# Altium PCB PCB_Rev3_FINAL4LAYER.PcbDoc
Units mm, origin at the board's own origin, x right, y up, seen from the top; angles counter-clockwise.
Board outline 120.4 x 83.82 mm, 4 copper layers (Top Layer, GND, Power, Bottom Layer), stack 0.602 mm thick; 59 components, 76 nets, 363 pads, 34 vias.
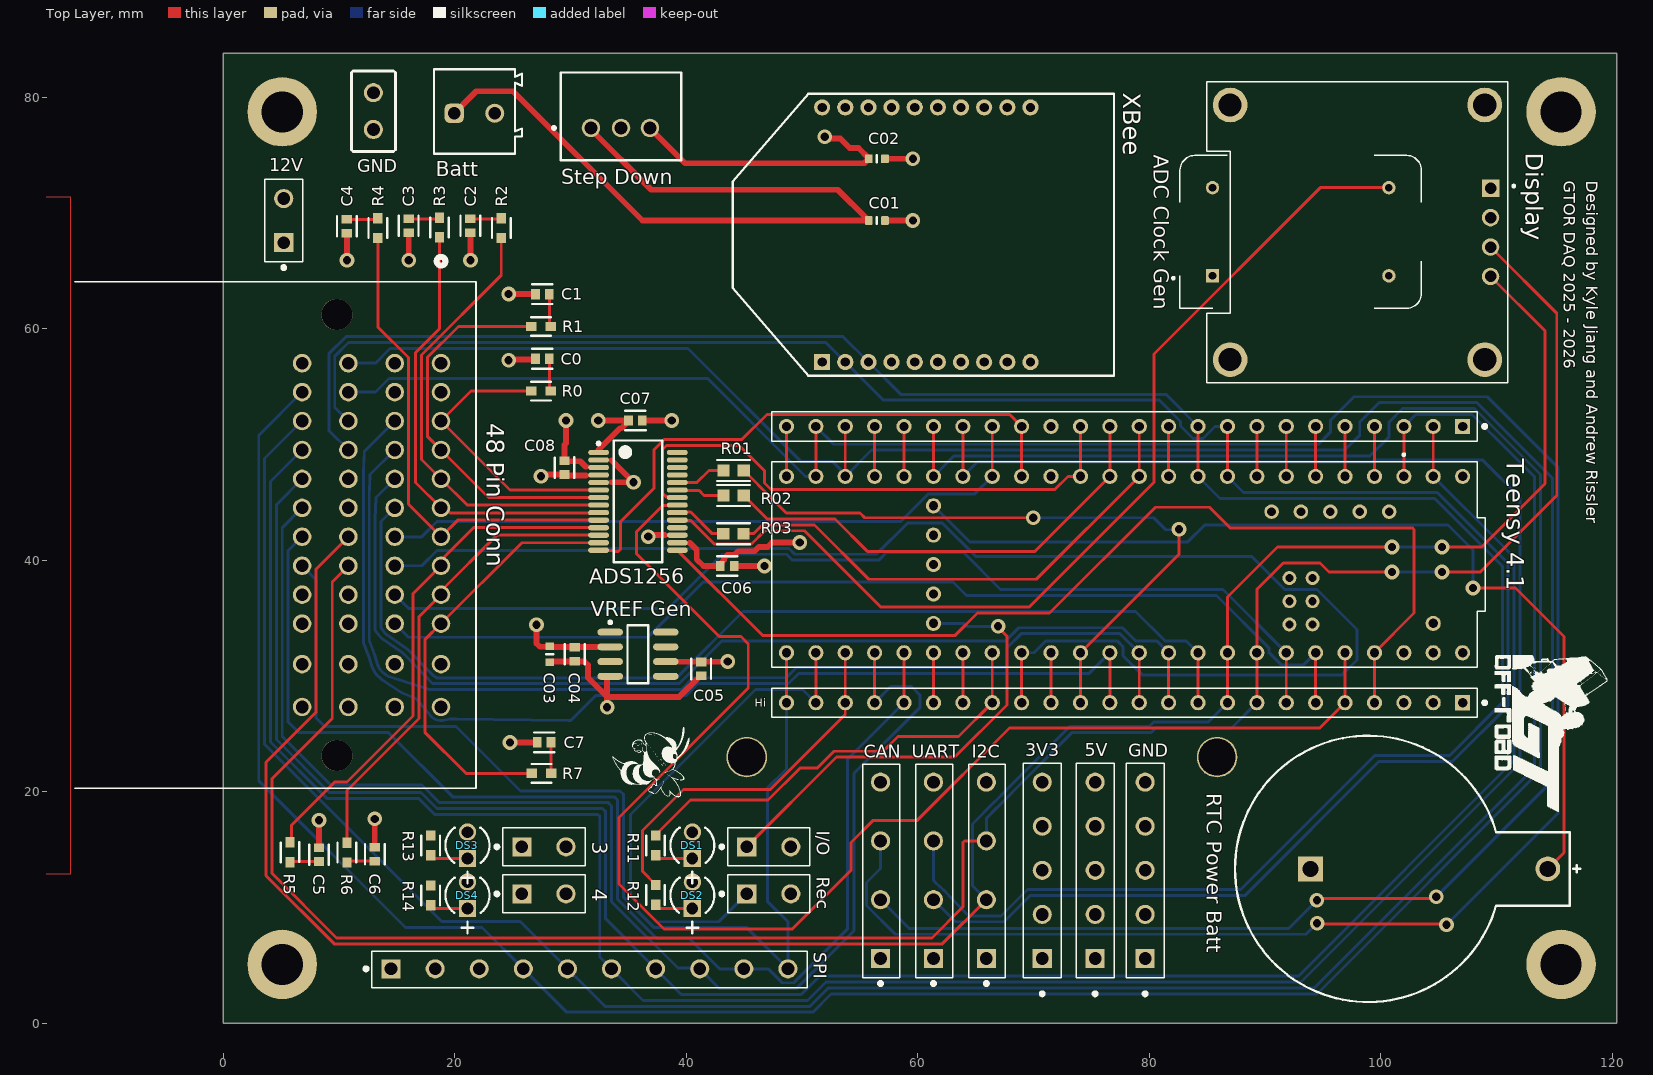
[diagram p0: Top Layer view]
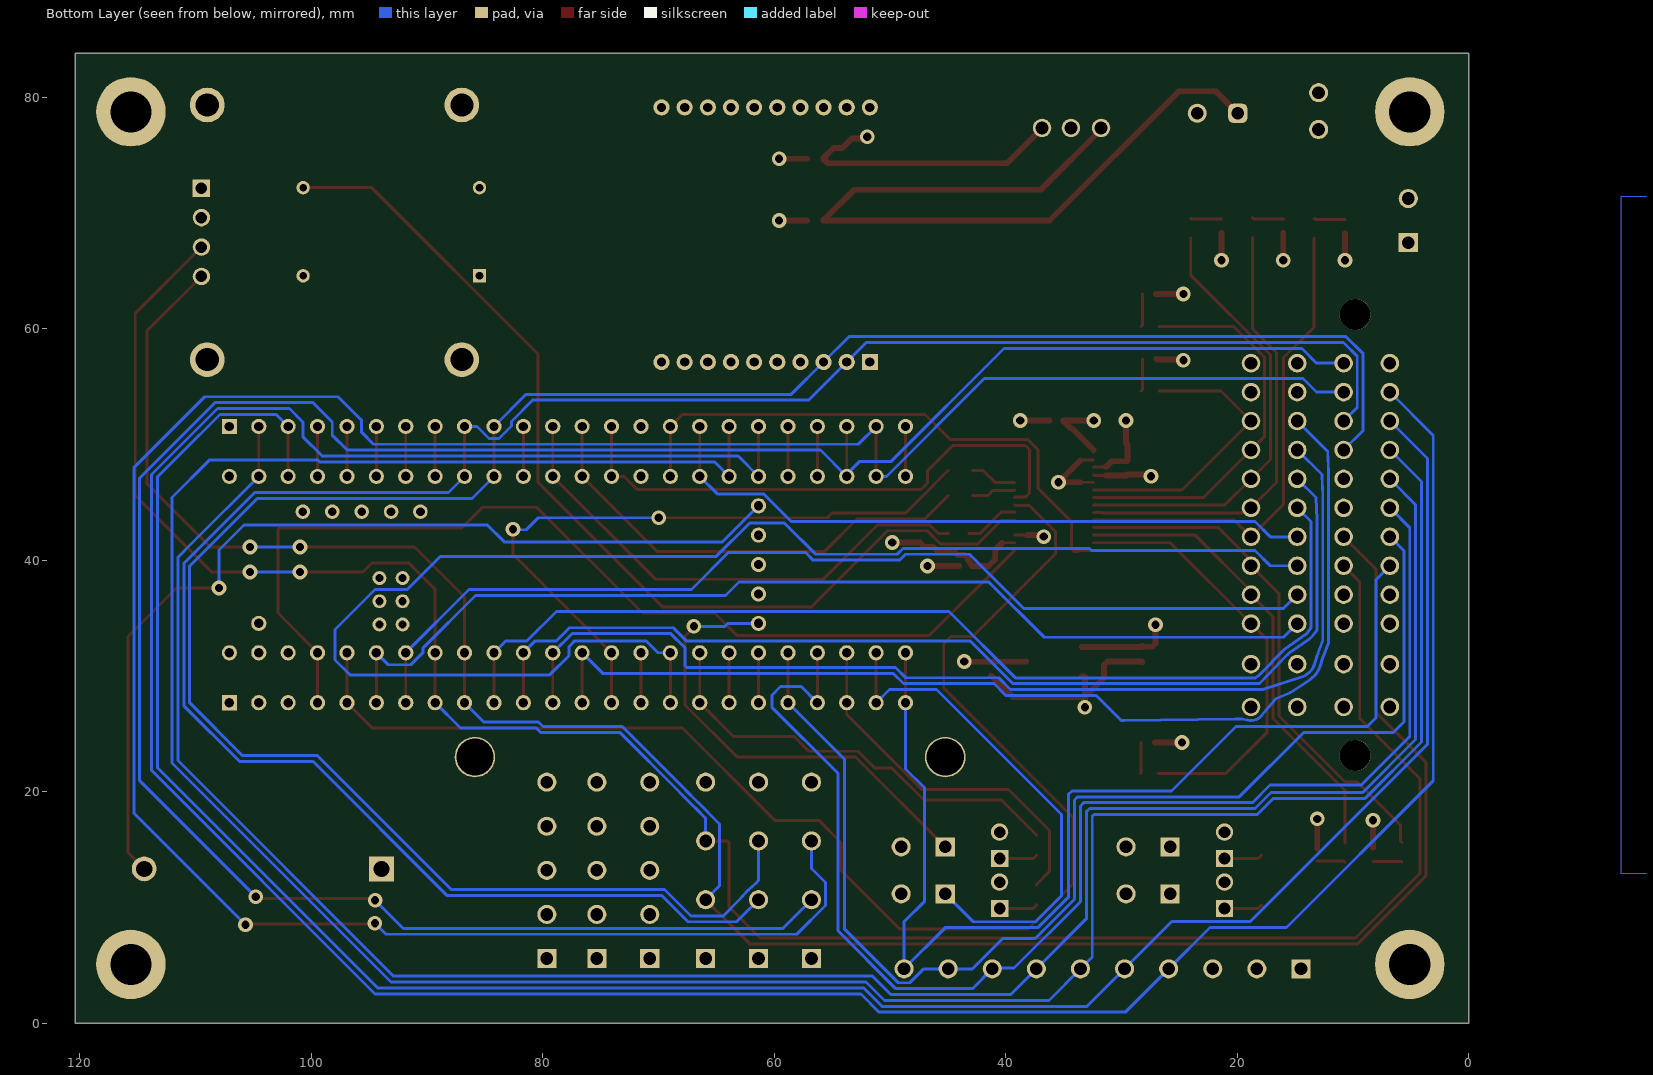
[diagram p1: Bottom Layer view, seen from below]
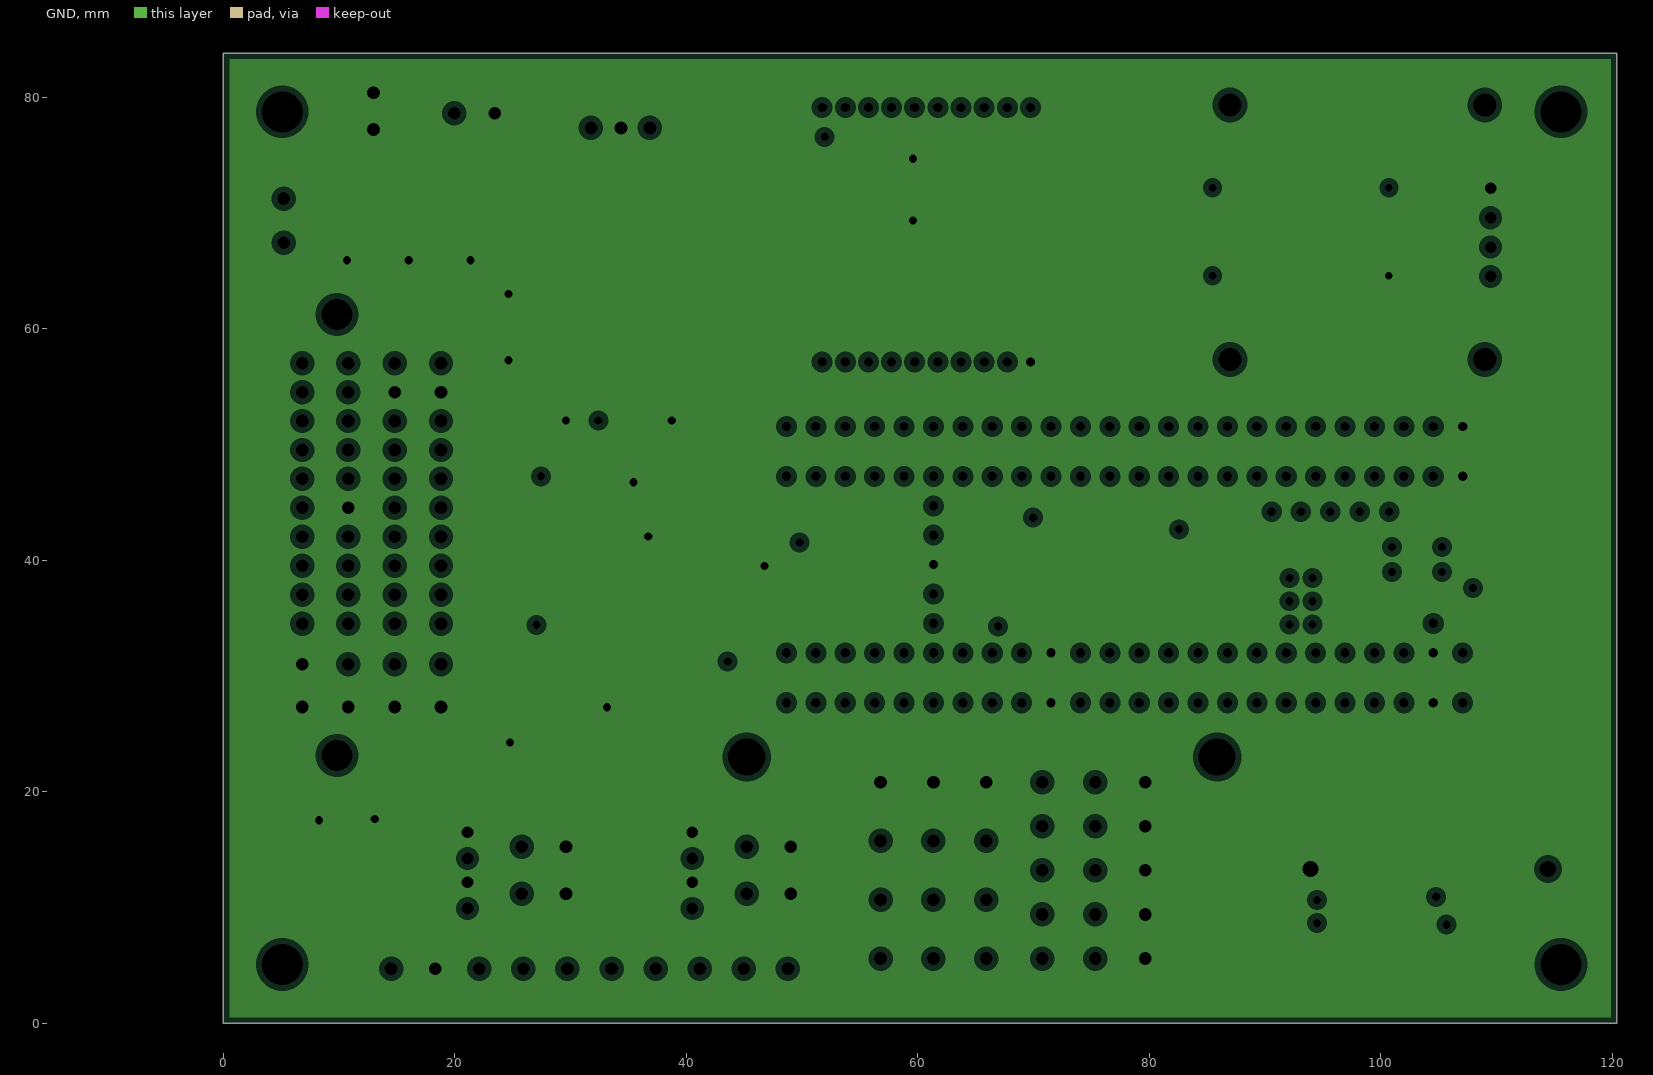
[diagram p2: GND, clearances drawn from the general rule]
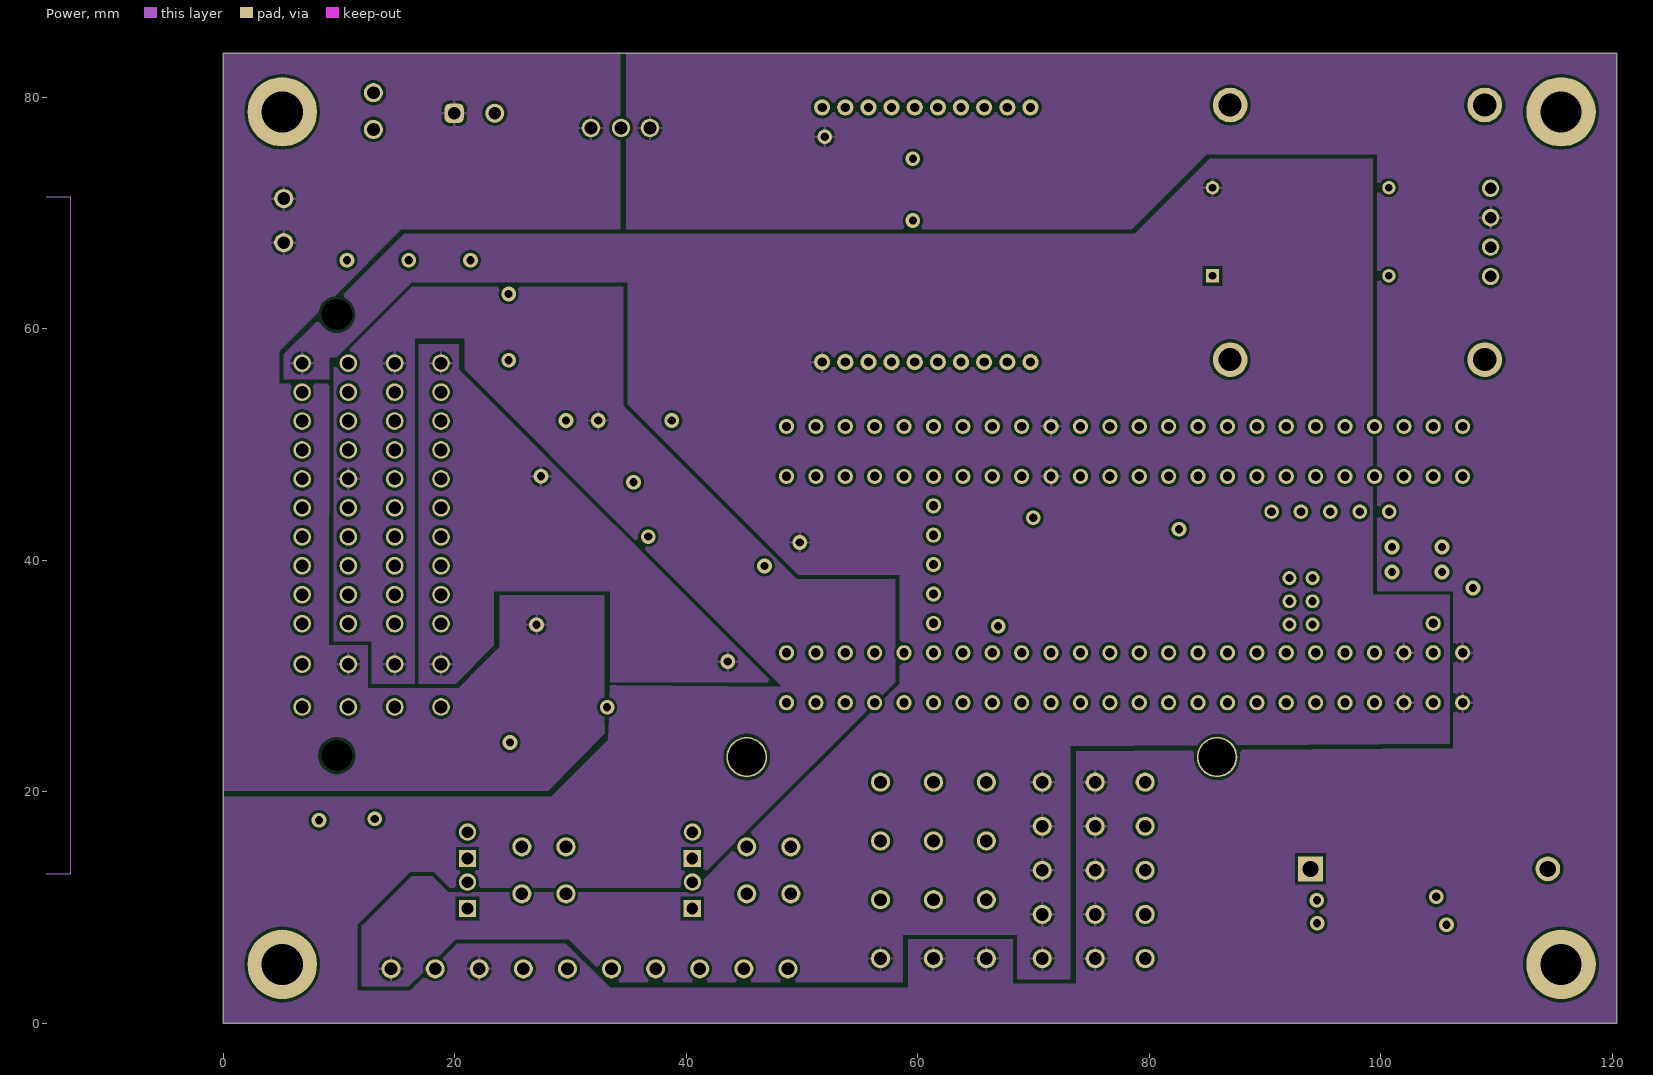
[diagram p3: Power]
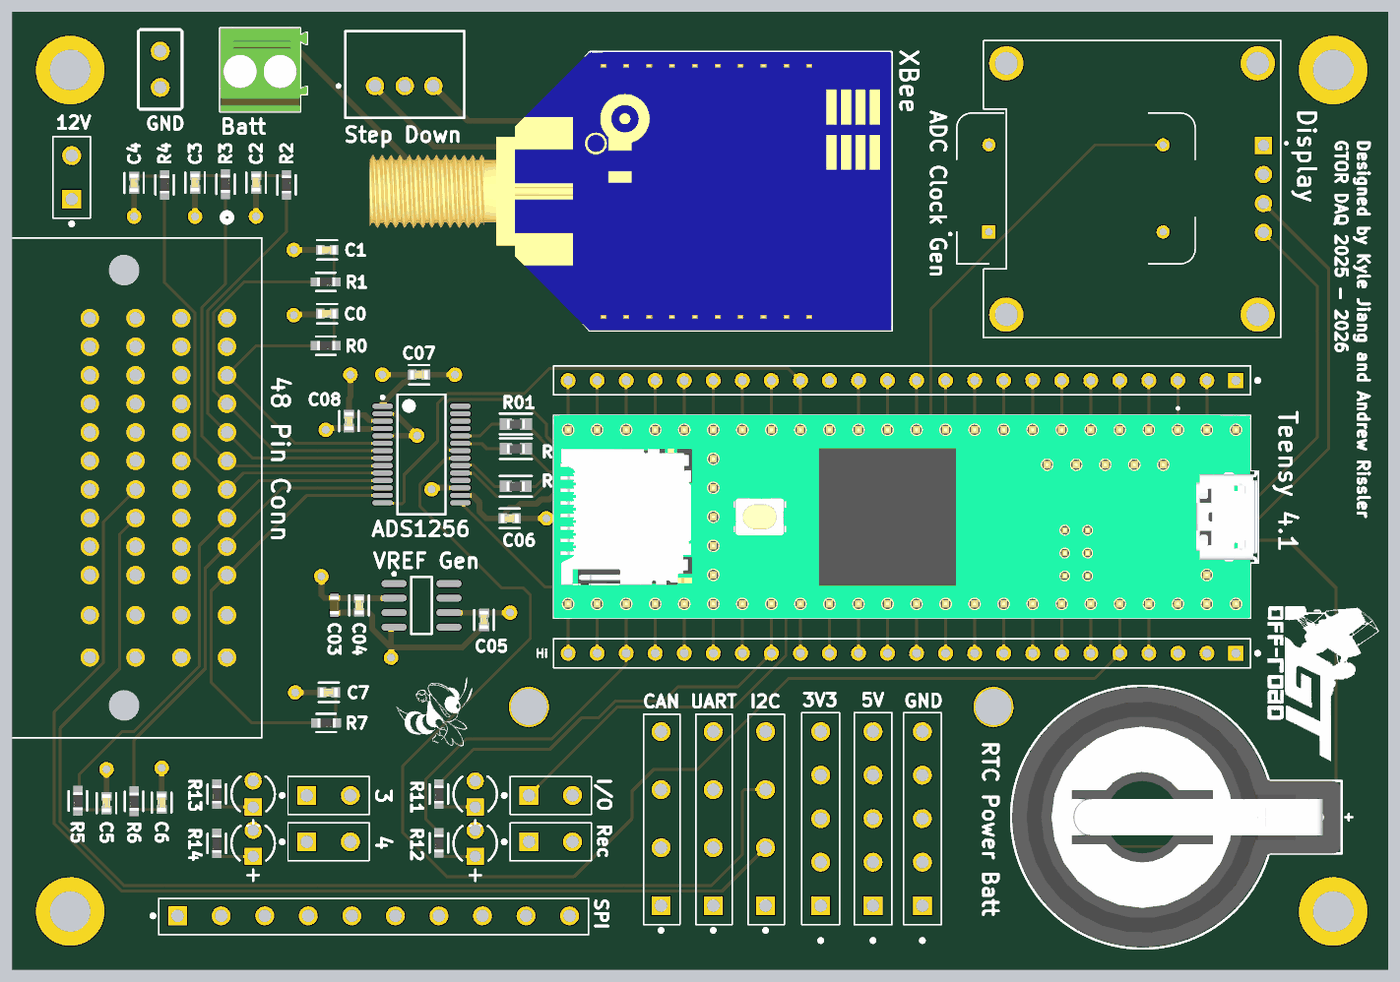
[diagram p4: 3D render of the assembled board from above, using the file's embedded part models]

## Layer stack, top to bottom
Top Solder: solder mask 0.0102, Solder Resist, Dk 3.5
Top Layer: signal copper 0.035
Dielectric 2: prepreg 0.0711, PP-006, Dk 4.1
GND: plane copper 0.035, net GND
Dielectric 1: dielectric 0.32, FR-4, Dk 4.8
Power: signal copper 0.035
Dielectric 3: prepreg 0.0711, PP-006, Dk 4.1
Bottom Layer: signal copper 0.035
Bottom Solder: solder mask 0.0102, Solder Resist, Dk 3.5

## Board outline
0,0 0,83.82 120.396,83.82 120.396,0

## Design rules (kind name [scope] priority, off if disabled: settings)
Clearance [All] p1: gap=0.254 ignorepadtopadclearanceinfootprint=FALSE
ComponentClearance Ignore_Xbee_C02 [InComponent('XBee') And OnLayer('Top Layer') vs InComponent('C02') And OnLayer('Top Layer')] p1 off: gap=0 collisioncheckmode=3 verticalgap=0 showdistances=FALSE donotcheckwithout3dbody=TRUE
ComponentClearance Ignore_Xbee_C01 [InComponent('XBee') And OnLayer('Top Layer') vs InComponent('C01') And OnLayer('Top Layer')] p2 off: gap=0 collisioncheckmode=3 verticalgap=0 showdistances=FALSE donotcheckwithout3dbody=TRUE
ComponentClearance Ignore_48pin_Collision [InComponent('48 Pin Conn') And OnLayer('Top Layer')] p3: gap=0 collisioncheckmode=3 verticalgap=0 showdistances=FALSE donotcheckwithout3dbody=TRUE
ComponentClearance Ignore_OLED_Collision [HasFootprint('MODULE_DM-OLED096-636') vs HasFootprint('OSC_ECS-100AX-500')] p4: gap=0 collisioncheckmode=3 verticalgap=0 showdistances=FALSE donotcheckwithout3dbody=TRUE
ComponentClearance [All] p5 off: gap=0.254 collisioncheckmode=3 verticalgap=0.254 showdistances=FALSE
HoleSize [All] p1: absolutevalues=TRUE maxlimit=3.6 minlimit=0.025 maxpercent=80.000 minpercent=20.000
PlaneClearance [All] p1: clearance=0.508
PlaneConnect [All] p1: planeconnectstyle=Relief reliefexpansion=0.508 reliefentries=4 reliefconductorwidth=0.254 reliefairgap=0.254
PolygonConnect [All] p1: connectstyle=Relief reliefconductorwidth=0.254 reliefentries=4 polygonreliefangle="90 Angle" airgapwidth=0.254
RoutingVias [All] p1: holewidth=0.711 width=1.27 viastyle="Through Hole" minholewidth=0.711 minwidth=1.27 maxholewidth=0.711 maxwidth=1.27
SolderMaskExpansion [All] p1: expansion=0.102 istentingtop=FALSE
SupplyNets "Schematic Supply Nets" [InNet('GND')] p1: voltage=0.000
Width [All] p1: maxlimit=0.5 minlimit=0.254 preferedwidth=0.254 midlayer1_maxwidth=0.254 minimp=50.000000 maximp=50.000000 favimp=50.000000
26 further rules are at their usual default settings.

## Classes and differential pairs
component class MainSchematic.3: 1 2 08 "ADC Clock Generator" ADS1256 "Analog VREF Generator" C01 C02 C03 C04 C05 C06 C07 C08 R01 R02 R03 "RTC power batt" "Step Down" "Teensy 4.1" XBee
component class Filters.3: C0 C1 C2 C3 C4 C5 C6 C7 R0 R1 R2 R3 R4 R5 R6 R7
component class 48PinConnector: 2 3 3V3 5V 6 7 8 12V "48 Pin Conn" Batt Batt1 CAN CAN1 Display Display1 DS1 DS2 DS3 DS4 GND GND1 I2C I/O I/O1 R11 R12 R13 R14 Rec Rec1 SPI SPI1 UART UART1

## Components (designator, comment, footprint, x,y, rotation, side; value= is the part's Value field where it differs from the comment)
2 "282837-4" TE_282837-4#1 107.061,51.562 r180 top
3 "282837-4" TE_282837-4#2 25.781,15.24 r0 top (schematic designator "Btn 3")
3V3 "282837-4" TE_282837-4#3 70.739,5.588 r90 top
4 "282837-4" TE_282837-4#2 25.781,11.176 r0 top (schematic designator "Btn 4")
5V "282837-4" TE_282837-4#3 75.311,5.588 r90 top
12V "282837-4" TE_282837-4#2 5.207,67.437 r90 top
"48 Pin Conn" "366380003" CONN_36638-0003_MOL 18.796,57.023 r270 top (schematic designator J?)
"ADC Clock Gen" "MCO-1510A" OSC_ECS-100AX-500 93.07,68.375 r0 top (schematic designator "ADC Clock Generator")
ADS1256 "ADS1256IDBTG4" TI-DB28_L 35.814,45.085 r0 top
Batt "691214110002S" 691214110002S 21.689,78.763 r0 top
C0 "C0603C104M4RAC" FP-C0603C-CF-MFG 27.559,57.404 r180 top value="0.10 μF"
C1 "C0603C104M4RAC" FP-C0603C-CF-MFG 27.559,62.992 r180 top value="0.10 μF"
C01 "Capacitor 1µF +/-0.1% 25V 0603" CAPC0603(1608)100_L 56.45,69.342 r180 top value=1µF
C2 "C0603C104M4RAC" FP-C0603C-CF-MFG 21.336,68.89 r270 top value="0.10 μF"
C02 "Capacitor 1µF +/-0.1% 25V 0603" CAPC0603(1608)100_L 56.45,74.676 r180 top value=1µF
C3 "C0603C104M4RAC" FP-C0603C-CF-MFG 16.002,68.89 r270 top value="0.10 μF"
C03 "Capacitor 1µF +/-0.1% 25V 0603" CAPC0603(1608)100_L 28.194,31.877 r90 top value=1µF
C4 "C0603C104M4RAC" FP-C0603C-CF-MFG 10.668,68.854 r270 top value="0.10 μF"
C04 "C0603C104M4RAC" FP-C0603C-CF-MFG 30.353,31.877 r270 top value="0.10 μF"
C5 "C0603C104M4RAC" FP-C0603C-CF-MFG 8.255,14.565 r90 top value="0.10 μF"
C05 "C0603C104M4RAC" FP-C0603C-CF-MFG 41.275,30.607 r270 top value="0.10 μF"
C6 "C0603C104M4RAC" FP-C0603C-CF-MFG 13.081,14.605 r90 top value="0.10 μF"
C06 "C0603C104M4RAC" FP-C0603C-CF-MFG 43.523,39.497 r0 top value="0.10 μF"
C7 "C0603C104M4RAC" FP-C0603C-CF-MFG 27.706,24.257 r180 top value="0.10 μF"
C07 "C0603C104M4RAC" FP-C0603C-CF-MFG 35.595,52.07 r0 top value="0.10 μF"
C08 "C0603C104M4RAC" FP-C0603C-CF-MFG 29.464,48.006 r90 top value="0.10 μF"
CAN "282837-4" TE_282837-4#4 56.769,5.588 r90 top
Display "DM-OLED096-636" MODULE_DM-OLED096-636 97.974,68.326 r270 top
DS1 "304090041" LED-2P-2.28-3MM_A 40.513,15.367 r90 top
DS2 "304090041" LED-2P-2.28-3MM_A 40.513,11.049 r90 top
DS3 "304090041" LED-2P-2.28-3MM_A 21.082,15.367 r90 top
DS4 "304090041" LED-2P-2.28-3MM_A 21.082,11.049 r90 top
GND "282837-4" TE_282837-4#3 79.629,5.588 r90 top
Hi "282837-4" TE_282837-4#1 107.061,27.686 r180 top (schematic designator 1)
I2C "282837-4" TE_282837-4#4 65.913,5.588 r90 top
I/O "282837-4" TE_282837-4#2 45.212,15.24 r0 top
R0 "RT0603BRD07300RL" FP-RT0603-MFG 27.432,54.61 r0 top value=300Ω
R1 "RT0603BRD07300RL" FP-RT0603-MFG 27.432,60.198 r0 top value=300Ω
R01 "AC0603FR-10100RL" FP-AC0603-IPC_A 44.069,47.752 r180 top
R2 "RT0603BRD07300RL" FP-RT0603-MFG 24.003,68.685 r90 top value=300Ω
R02 "AC0603FR-10100RL" FP-AC0603-IPC_A 44.069,45.593 r180 top
R3 "RT0603BRD07300RL" FP-RT0603-MFG 18.669,68.74 r90 top value=300Ω
R03 "AC0603FR-10100RL" FP-AC0603-IPC_A 44.057,42.291 r180 top
R4 "RT0603BRD07300RL" FP-RT0603-MFG 13.335,68.685 r90 top value=300Ω
R5 "RT0603BRD07300RL" FP-RT0603-MFG 5.753,14.771 r270 top value=300Ω
R6 "RT0603BRD07300RL" FP-RT0603-MFG 10.668,14.732 r270 top value=300Ω
R7 "RT0603BRD07300RL" FP-RT0603-MFG 27.471,21.59 r0 top value=300Ω
R11 "RT0603BRD07300RL" FP-RT0603-MFG 37.338,15.367 r270 top value=300Ω
R12 "RT0603BRD07300RL" FP-RT0603-MFG 37.338,11.087 r270 top value=300Ω
R13 "RT0603BRD07300RL" FP-RT0603-MFG 17.907,15.367 r270 top value=300Ω
R14 "RT0603BRD07300RL" FP-RT0603-MFG 17.907,11.049 r270 top value=300Ω
Rec "282837-4" TE_282837-4#2 45.212,11.176 r0 top
"RTC Power Batt" "101" FP-101-MFG 101.854,13.335 r0 top (schematic designator "RTC power batt")
SPI "282837-4" TE_282837-4#5 14.478,4.699 r0 top (schematic designator J?)
"Step Down" "OKI-78SR-5/1.5-W36-C" MURA-OKI-78SR-3 34.35,77.343 r0 top (schematic designator "Step Down Circuit")
"Teensy 4.1" "DEV-16771" MODULE_DEV-16771 77.851,39.624 r180 top
UART "282837-4" TE_282837-4#4 61.341,5.588 r90 top
"VREF Gen" "ADR4550ARZ" ADI-R-8_N 35.814,31.877 r0 top (schematic designator "Analog VREF Generator")
XBee "XBP9B-DPST-001" DIP2200W51P200L3294H279Q20P 60.473,68.121 r90 top

## Footprints (in the part's own frame and the unit in brackets; to place one, negate y for a bottom-side part, rotate by r counter-clockwise, add the part's x,y. Pads: shape width x height; smd on the part's side, far side on the other; paste and mask are expansions set on the pad)
691214110002S [mm]
  rrect50% 1.65x1.65 hole 1.1: 1(-1.75,-0.15)
  round 1.65 hole 1.1: 2(1.75,-0.15)
  silkscreen extent -3.5,-3.65 4.1,3.65, body extent -3.5,-3.65 4.1,3.65, height 9.15
ADI-R-8_N [mm] "SOIC, 8-Leads, Body 4.9x3.9mm, Pitch 1.27mm, IPC Medium Density"
  oval 2.2x0.6 smd: 1(-2.4,1.905) 2(-2.4,0.635) 3(-2.4,-0.635) 4(-2.4,-1.905) 5(2.4,-1.905) 6(2.4,-0.635) 7(2.4,0.635) 8(2.4,1.905)
  silkscreen extent -2.52,-2.5 0.9,2.88, body extent -2,-2.5 2,2.5, height 1.75
CAPC0603(1608)100_L [mm]
  rrect25% 0.66x0.76 smd: 1(-0.7,0) 2(0.7,0)
  silkscreen extent 0,-0.3 0,0.3, body extent -0.8,-0.4 0.8,0.4, height 0.95
CONN_36638-0003_MOL [mil]
  round 63 / inner round 60 / far side round 63 hole 43 paste-99999 mask+0: A1(0,0) A2(0,-157.48) A3(0,-314.96) A4(0,-472.44) B1(98.43,0) B2(98.43,-157.48) B3(98.43,-314.96) B4(98.43,-472.44) C1(196.85,0) C2(196.85,-157.48) C3(196.85,-314.96) C4(196.85,-472.44) D1(295.28,0) D2(295.28,-157.48) D3(295.28,-314.96) D4(295.28,-472.44) E1(393.7,0) E2(393.7,-157.48) E3(393.7,-314.96) E4(393.7,-472.44) F1(492.13,0) F2(492.13,-157.48) F3(492.13,-314.96) F4(492.13,-472.44) G1(590.55,0) G2(590.55,-157.48) G3(590.55,-314.96) G4(590.55,-472.44) H1(688.98,0) H2(688.98,-157.48) H3(688.98,-314.96) H4(688.98,-472.44) J1(787.4,0) J2(787.4,-157.48) J3(787.4,-314.96) J4(787.4,-472.44) K1(885.83,0) K2(885.83,-157.48) K3(885.83,-314.96) K4(885.83,-472.44) L1(1023.62,0) L2(1023.62,-157.48) L3(1023.62,-314.96) L4(1023.62,-472.44) M1(1169.29,0) M2(1169.29,-157.48) M3(1169.29,-314.96) M4(1169.29,-472.44)
  round 106 / inner round 60 / far side round 106 hole 106 unplated paste-99999 mask+0: MOUNT1(-165.35,-354.33) MOUNT2(1334.65,-354.33)
  Multi-Layer lines w1: 1441.15,-2098.83 -271.85,-2098.83 -271.85,-1377.9 -566.85,-1377.9 -566.85,-1259.9 1736.15,-1259.9 1736.15,-1377.9 1441.15,-1377.9 1441.15,-2098.83
  silkscreen extent -362,-1245 1446,119
DIP2200W51P200L3294H279Q20P [mm]
  rect 1.4x1.4 / inner round 1.4 / far side rect 1.4x1.4 hole 0.8 mask+0.102: 1(-11,8.75)
  round 1.4 hole 0.8 mask+0.102: 2(-11,6.75) 3(-11,4.75) 4(-11,2.75) 5(-11,0.75) 6(-11,-1.25) 7(-11,-3.25) 8(-11,-5.25) 9(-11,-7.25) 10(-11,-9.25) 11(11,-9.25) 12(11,-7.25) 13(11,-5.25) 14(11,-3.25) 15(11,-1.25) 16(11,0.75) 17(11,2.75) 18(11,4.75) 19(11,6.75) 20(11,8.75)
  silkscreen extent -12.19,-16.47 12.19,16.47, body extent -12.19,-16.47 12.19,29.17, height 7.67
FP-101-MFG [mm]
  rect 2.145x2.145 hole 1.395 paste-2539.97 mask+0: 1(-7.925,0)
  round 2.145 hole 1.395 paste-2539.97 mask+0: 2(12.565,0)
  silkscreen extent -14.46,-11.5 15.37,11.5, body extent -14.57,-11.61 14.57,11.61, height 0.25
FP-AC0603-IPC_A [mm]
  rect 1.059x1.012 smd paste+0 mask+0: 1(-0.877,0) 2(0.877,0)
  silkscreen extent -1.41,-0.91 1.41,0.91, body extent -1.91,-1.01 1.91,1.01, height 0.25
FP-C0603C-CF-MFG [mm]
  rect 0.75x0.9 smd paste+0 mask+0: 1(-0.6,0) 2(0.6,0)
  silkscreen extent -0.87,-0.85 0.88,0.85, body extent -1.2,-0.6 1.2,0.6, height 0.25
FP-RT0603-MFG [mm]
  rect 0.9x0.8 smd paste+0 mask+0: 1(-0.85,0) 2(0.85,0)
  silkscreen extent -0.85,-0.81 0.86,0.8, body extent -1.4,-0.55 1.4,0.55, height 0.25
LED-2P-2.28-3MM_A [mm] "LED, 2-Leads, Dia 3mm, Pitch 2.28mm"
  rect 1.5x1.5 hole 1: 1(-1.14,0)
  round 1.5 hole 1: 2(1.14,0)
  silkscreen extent -3.29,-1.9 1.52,1.9, body extent -1.9,-1.91 1.52,1.91, height 5.3
MODULE_DEV-16771 [mm]
  round 1.308 hole 0.8: 0(-26.67,-7.62) 1(-24.13,-7.62) 2(-21.59,-7.62) 3(-19.05,-7.62) 3.3V_1(6.35,-7.62) 3.3V_2(-24.13,7.62) 3.3V_3(16.51,-2.54) 4(-16.51,-7.62) 5(-13.97,-7.62) 6(-11.43,-7.62) 7(-8.89,-7.62) 8(-6.35,-7.62) 9(-3.81,-7.62) 10(-1.27,-7.62) 11(1.27,-7.62) 12(3.81,-7.62) 13(3.81,7.62) 14(1.27,7.62) 15(-1.27,7.62) 16(-3.81,7.62) 17(-6.35,7.62) 18(-8.89,7.62) 19(-11.43,7.62) 20(-13.97,7.62) 21(-16.51,7.62) 22(-19.05,7.62) 23(-21.59,7.62) 24(8.89,-7.62) 25(11.43,-7.62) 26(13.97,-7.62) 27(16.51,-7.62) 28(19.05,-7.62) 29(21.59,-7.62) 30(24.13,-7.62) 31(26.67,-7.62) 32(29.21,-7.62) 33(29.21,7.62) 34(26.67,7.62) 35(24.13,7.62) 36(21.59,7.62) 37(19.05,7.62) 38(16.51,7.62) 39(13.97,7.62) 40(11.43,7.62) 41(8.89,7.62) GND1(-29.21,-7.62) GND2(6.35,7.62) GND3(-26.67,7.62) GND4(16.51,0) ON/OFF(16.51,5.08) PROGRAM(16.51,2.54) VBAT(16.51,-5.08) VIN(-29.21,7.62) VUSB(-26.67,5.08)
  round 1.258 hole 0.75: 5V(-22.86,-4.57) D+(-17.78,-4.57) D-(-20.32,-4.57) USB_GND1(-15.24,-4.57) USB_GND2(-12.7,-4.57)
  round 1.208 hole 0.7: GND5(-14.24,3.17) LED(-16.24,3.17) R+(-16.24,5.17) R-(-14.24,5.17) T+(-14.24,1.17) T-(-16.24,1.17)
  silkscreen extent -31.18,-9.6 30.48,8.89, body extent -31.18,-8.89 30.48,8.89, height 7.15
MODULE_DM-OLED096-636 [mm]
  rect 1.508x1.508 / inner round 1.508 / far side rect 1.508x1.508 hole 1: 1(-3.81,11.5)
  round 1.508 hole 1: 2(-1.27,11.5) 3(1.27,11.5) 4(3.81,11.5)
  round 3 hole 2: S1(-11,11) S2(11,11) S3(11,-11) S4(-11,-11)
  silkscreen extent -13,-13 13,13.6
MURA-OKI-78SR-3 [mm] "THMT, 3-Leads, Body 10.4x7.6mm"
  round 1.6 hole 1.1: 1(-2.6,0) 2(0,0) 3(2.5,0)
  silkscreen extent -5.92,-2.8 5.2,4.8, body extent -5.2,-2.8 5.2,4.8, height 16.5
OSC_ECS-100AX-500 [mm]
  rect 1.158x1.158 hole 0.65: 1(-7.62,-3.81)
  round 1.158 hole 0.65: 7(7.62,-3.81) 8(7.62,3.81) 14(-7.62,3.81)
  silkscreen extent -11.1,-6.6 10.43,6.6
TE_282837-4#1 [mm]
  rect 1.308x1.308 / inner round 1.308 / far side rect 1.308x1.308 hole 0.8: 1(0,0)
  round 1.308 hole 0.8: 2(2.54,0) 3(5.08,0) 4(7.62,0) 5(10.16,0) 6(12.7,0) 7(15.24,0) 8(17.78,0) 9(20.32,0) 10(22.86,0) 11(25.4,0) 12(27.94,0) 13(30.48,0) 14(33.02,0) 15(35.56,0) 16(38.1,0) 17(40.64,0) 18(43.18,0) 19(45.72,0) 20(48.26,0) 21(50.8,0) 22(53.34,0) 23(55.88,0) 24(58.42,0)
  silkscreen extent -2.05,-1.27 59.69,1.27
TE_282837-4#2 [mm]
  rect 1.65x1.65 / inner round 1.65 / far side rect 1.65x1.65 hole 1.1: 1(0,0)
  round 1.65 hole 1.1: 2(3.81,0)
  silkscreen extent -2.31,-1.65 5.46,1.65
TE_282837-4#3 [mm]
  rect 1.65x1.65 / inner round 1.65 / far side rect 1.65x1.65 hole 1.1: 1(0,0)
  round 1.65 hole 1.1: 2(3.81,0) 3(7.62,0) 4(11.43,0) 5(15.24,0)
  silkscreen extent -3.2,-1.65 16.89,1.65
TE_282837-4#4 [mm]
  rect 1.65x1.65 / inner round 1.65 / far side rect 1.65x1.65 hole 1.1: 1(0,0)
  round 1.65 hole 1.1: 2(5.08,0) 3(10.16,0) 4(15.24,0)
  silkscreen extent -2.31,-1.65 16.76,1.52, body extent -1.65,-1.65 16.76,1.52, height 0.25
TE_282837-4#5 [mm]
  rect 1.65x1.65 / inner round 1.65 / far side rect 1.65x1.65 hole 1.1: 1(0,0)
  round 1.65 hole 1.1: 2(3.81,0) 3(7.62,0) 4(11.43,0) 5(15.24,0) 6(19.05,0) 7(22.86,0) 8(26.67,0) 9(30.48,0) 10(34.29,0)
  silkscreen extent -2.31,-1.65 35.94,1.52
TI-DB28_L [mm] "SOP, 28-Leads, Body 10.2x5.3mm, Pitch 0.65mm, IPC High Density"
  oval 1.8x0.45 smd: 1(-3.4,4.225) 2(-3.4,3.575) 3(-3.4,2.925) 4(-3.4,2.275) 5(-3.4,1.625) 6(-3.4,0.975) 7(-3.4,0.325) 8(-3.4,-0.325) 9(-3.4,-0.975) 10(-3.4,-1.625) 11(-3.4,-2.275) 12(-3.4,-2.925) 13(-3.4,-3.575) 14(-3.4,-4.225) 15(3.4,-4.225) 16(3.4,-3.575) 17(3.4,-2.925) 18(3.4,-2.275) 19(3.4,-1.625) 20(3.4,-0.975) 21(3.4,-0.325) 22(3.4,0.325) 23(3.4,0.975) 24(3.4,1.625) 25(3.4,2.275) 26(3.4,2.925) 27(3.4,3.575) 28(3.4,4.225)
  silkscreen extent -3.52,-5.25 2.1,5.25, body extent -2.8,-5.25 2.8,5.25, height 2

## Part data
2 3 3V3 4 5V 12V CAN GND Hi I2C I/O Rec SPI UART: "4 Position Wire to Board Terminal Block Horizontal with Board 0.200 (5.08mm) Through Hole", Package=None, Availability="In Stock", Check_prices=https://www.snapeda.com/parts/282837-4/TE+Connectivity+AMP+Connectors/view-part/?ref=eda, EU_RoHS_Compliance="Compliant with Exemptions", MF="TE Connectivity", MP=282837-4, Price=None, Purchase-URL=https://pricing.snapeda.com/search/part/282837-4/?ref=eda, SnapEDA_Link=https://www.snapeda.com/parts/282837-4/TE+Connectivity+AMP+Connectors/view-part/?ref=snap
"48 Pin Conn": "2.50mm, 3.50mm CMC Header, Right-Angle, 48 Position, 1 Port, Brown, Peg,  Lead-Free", Manufacturer_Name="Molex Connector Corporation", Copyright="Copyright (C) 2025 Ultra Librarian. All rights reserved.", Manufacturer_Part_Number=366380003, RefDes=RefDes, Type=Type
"ADC Clock Gen": library part ECS-100AX-500, "Oscillator  14-DIP, 4 Leads (Full Size, Metal Can)", Package=None, Availability=Unavailable, MP=ECS-100AX-500, Price=None
ADS1256: library part CMP-0003-00153-1, "24-Bit, 30 kSPS Very Low Noise Delta-Sigma ADC with Multiplexer, -40 to 85 degC, 28-pin SOP (DB28), Green (RoHS & no Sb/Br)", Analog Voltage AV/DD(Max)(V)=5.25, Analog Voltage AV/DD(Min)(V)=4.75, Manufacturer="Texas Instruments", # Input Channels=8, Architecture=Delta-Sigma, Code_JEDEC=MO-150, ComponentLink1Description="Manufacturer URL", ComponentLink1URL=http://www.ti.com/, ComponentLink2Description=Datasheet, ComponentLink2URL=http://www.ti.com/general/docs/lit/getliterature.tsp?genericPartNumber=ADS1256&fileType=pdf, ComponentLink3Description="Package Specification", ComponentLink3URL=http://www.ti.com/lit/ml/msso002e/msso002e.pdf, DatasheetVersion=SBAS288J, Digital Supply(Max)(V)=3.6, Digital Supply(Min)(V)=1.8, Eco-Plan="Green (RoHS & no Sb/Br)", Interface="Serial SPI", Mounting Technology="Surface Mount", PackageDescription="28-Pin Plastic Small Outline, Body 10.2 X 5.3 mm, Pitch 0.65 mm", PackageReference=DB28, PackageVersion="4040065/E, 12/2001", PartNumber=ADS1256IDBTG4, Resolution(Bits)=24, Sample Rate (max)(SPS)=30k, SubFamily="Precision ADC (<=10MSPS)"
Batt: library part CMP-1502-02465-2, Current Rating=10A, Max Operating Temperature=120°C, Min Operating Temperature=-30°C, Voltage Rating=300V, Contact Material="Nickel, Tin", Height=9.2mm, Lead Pitch=3.5mm, NexarPartId=94172715, Number of Contacts=2, Number of Pins=2, Number of Rows=1, Packaging=Box
C0 C1 C2 C3 C4 C04 C5 C05 C6 C06 C7 C07 C08: library part CMP-03020-019612-2, "C0603 0.10 μF X7R 30ppm/°C 20.00% 16 V", Capacitance="0.10 μF", Manufacturer=KEMET, Package=C0603C-CF, Temperature="-55°C to +125°C", Temperature Characteristic=X7R, Temperature Coefficient=30ppm/°C, Temperature Range High=+125°C, Temperature Range Low=-55°C, Tolerance=0.2, Voltage Rating="16 V", Automotive=Yes, Automotive Grade="Grade 1", Category=Cap, ComponentLink2Description=Datasheet, ComponentLink2URL=https://api.kemet.com/component-edge/download/datasheet/C0603C100J5GACAUTO.pdf, Device Class L1="Passive Components", Device Class L2=Capacitors, Device Class L3="Ceramic Capacitors", Height=0.87mm, Lead Free=Yes, Manufacturer Part Number=C0603C104M4RAC, Material=Ceramic, Mouser Description="Ceramic Multilayer Capacitor; Capacitor Type: General Purpose; Capacitance: 0.1uF; Capacitance Tolerance: +/- 20%;...", Octopart=https://octopart.com/c0603c104m4rac-kemet-1325405, RoHS=TRUE
C01 C02 C03: library part CMP-001-00055-4, "Chip Capacitor, 1µF +/-0.1%, 25V, 0603, Thickness 1 mm", Case/Package=0603, Manufacturer=TDK, Manufacturer Part Number=CGA3E3X5R1E105K080AB, Max Operating Temperature=85°C, Min Operating Temperature=-55°C, Tolerance=20%, Voltage Rating=25V, Component Type=Capacitors, Mounting Technology=SMT, Pins=2
Display: "0.96â€ 128 X 64 MONOCHROME GRAPHIC OLED DISPLAY MODULE - I2C", Package=Package, Check_prices=https://www.snapeda.com/parts/DM-OLED096-636/Display+Module/view-part/?ref=eda, MF="Display Module", MP=DM-OLED096-636, SnapEDA_Link=https://www.snapeda.com/parts/DM-OLED096-636/Display+Module/view-part/?ref=snap
DS1 DS2 DS3 DS4: library part CMP-007-00007-2, "Red LED, 80 mW, 30 mA, -25 to 85 degC, 2-Pin THD", Manufacturer="Shenzhen CGX", Package Description="2-Pin Through Hole Device, Dia 3 mm, Pitch 2.28 mm", Case/Package=304090041, Datasheet URL=http://datasheet.octopart.com/304090041-Chengguangxing-datasheet-62330656.pdf, Datasheet Version=Sep-14, Manufacturer URL=http://szcgx.com/, Mounting Technology=TH, Package Reference=304090041, RoHS Compliant=Unknown
R0 R1 R2 R3 R4 R5 R6 R7 R11 R12 R13 R14: library part CMP-2000-04432-2, "RES SMD 300 OHM 0.1% 1/10W 0603", Manufacturer=Yageo, Package=RT0603, Power Rating=0.1W, Resistance=300Ω, Temperature="-55°C to +155°C", Temperature Coefficient="25 ppm/°C", Temperature Range High=+155°C, Temperature Range Low=-55°C, Tolerance=0.001, Voltage Rating=75V, Automotive=No, Category=Res, ComponentLink2Description=Datasheet, ComponentLink2URL=http://www.yageo.com/documents/recent/PYu-RT_1-to-0.01_RoHS_L_9.pdf, Composition="Thin Film", Device Class L1="Passive Components", Device Class L2=Resistors, Device Class L3="Chip SMD Resistors", Digikey Description="RES SMD 300 OHM 0.1% 1/10W 0603", Footprint Url=http://www.yageo.com/exep/pages/download/literatures/PYu-R_Mount_10.pdf, Height=0.55mm, Ipc Land Pattern Name=RESC16080X45, Lead Free=Yes, Manufacturer Part Number=RT0603BRD07300RL, Mouser Description="Thin Film Resistors - SMD 1/10W 300 ohm .1% 25ppm", Octopart=https://octopart.com/rt0603brd07300rl-yageo-1463297, RoHS=TRUE, series=RT
R01 R02 R03: library part CMP-03412-011629-2, "RES 100Ω 1.00% 0.1W 0603", Case/Package=0603, Resistance=100R, Tolerance=1%, RoHS Compliant=Yes
"RTC Power Batt": library part CMP-19636-000018-1, "BATTERY HOLDER COIN 20MM PC PIN", Max Operating Temperature=145°C, Min Operating Temperature=-50°C, Package Quantity=1, Body Material=PBT, Contact Plating=Tin, Lead Free="Lead Free", Material=Steel, Mount="Through Hole", Number of Batteries=1, Number of Cells=1, Packaging=Bag, REACH SVHC="No SVHC", series=-, Termination="PC Pin"
"Step Down": library part CMP-2000-05274-1, "Non-Isolated DC/DC Converter, 7.5 W, 7 to 36 V, 1.5 A, -40 to 85 degC, 3-Pin THD, RoHS", Current - Output (Max)=1.5A, Manufacturer=Murata, Operating Temperature=-40degC~85degC, Package / Case=3-SIPModule, Power (Watts) - Manufacture Series=8W, Voltage - Input (Max)=36V, Voltage - Input (Min)=7V, Voltage - Isolation=-, Voltage - Output 1=5V, Applications=ITE(Commercial), Category=PowerSupplies-BoardMount, Datasheet URL=https://datasheet.ciiva.com/8006/1790439-8006672.pdf, Datasheet Version=Oct-13, Efficiency=90.5%, Family=DCDCConverters, Features=SCP, Manufacturer URL=http://www.murata.com/, Mounting Type=ThroughHole, Number of Outputs=1, Packaging=Tube, Power (Watts) - Max=8W, series=Okami™OKI-78SR, Size / Dimension="0.41\"Lx0.30\"Wx0.65\"H(10.4mmx7.6mmx16.5mm)", Type=LinearRegulatorReplacement, Voltage - Output 2=-, Voltage - Output 3=-
"Teensy 4.1": library part CMP-003-000000-1, "RT1062 Teensy 4.1 series ARM?Cortex?M7 MPU Embedded Evaluation Board", Package=None, Check_prices=https://www.snapeda.com/parts/DEV-16771/SparkFun+Electronics/view-part/?ref=eda, MF="SparkFun Electronics", MP=DEV-16771, SnapEDA_Link=https://www.snapeda.com/parts/DEV-16771/SparkFun+Electronics/view-part/?ref=snap
"VREF Gen": library part CMP-0784-00194-1, "Ultralow Noise, High Accuracy Voltage Reference, 5 V Output, 3 to 15 V Supply, Industrial, 8-pin SOIC (R-8), Tube", Manufacturer="Analog Devices", Operating Temp Range="-40 to 125 degC", Code_JEDEC=MS-012-AA, ComponentLink1Description="Manufacturer URL", ComponentLink1URL=http://www.analog.com/en/index.html, ComponentLink2Description=Datasheet, ComponentLink2URL=http://www.analog.com/static/imported-files/data_sheets/ADR4520_4525_4530_4533_4540_4550.pdf, ComponentLink3Description="Package Specification", ComponentLink3URL=http://www.analog.com/static/imported-files/packages/PKG_PDF/SOIC_Narrow%20(R)/R_8.pdf, ComponentLink4Description="URL Link1", ComponentLink4URL="Product URL:http://www.analog.com/en/special-linear-functions/voltage-references/adr4550/products/product.html", DatasheetVersion="Rev. 0", Max V Supply (V)=15, Min V Supply (V)=3, Mounting Technology="Surface Mount", PackageDescription="8-Pin Standard Small Outline Package, Body 4.9 x 3.9 mm, Pitch 1.27 mm", PackageReference=R-8, PackageVersion="060506-A, 06/2006", Packing=Tube, PartNumber=ADR4550ARZ, Ref Out TC (ppm/C)=4, Vout=5V
XBee: "General ISM < 1GHz - Transceiver Module 900MHz Antenna Not Included, RP-SMA Through Hole", Package="Module Digi International", Check_prices=https://www.snapeda.com/parts/XBP9B-DPST-001/Digi+International/view-part/?ref=eda, MF="Digi International", MP=XBP9B-DPST-001, SnapEDA_Link=https://www.snapeda.com/parts/XBP9B-DPST-001/Digi+International/view-part/?ref=snap

## Free pads (board coordinates)
  round 6 hole 3.55: 6(5.08,78.74) 7(5.08,5.08) 8(115.57,78.74) 9(115.57,5.08)
  round 3.5 hole 3.2: 13(45.212,22.987) 14(85.852,22.987)
  round 1.65 hole 1.1: 15(12.954,80.391) 16(12.954,77.216)

## Via types
v1: diameter 1.27, hole 0.711, Top Layer to Bottom Layer, 34 vias

## Nets (pads, with @x,y where several pads share a name; then routed paths per layer and width w, separated by ;. In a path a pad name is that pad's centre, name@x,y a point inside that pad or via, vN(x,y) a via of type N, cw(c..) or ccw(c..) an arc to the next point about the centre after c; other vN are vias at no path point)
GND: 2.1 3.2 4.2 "48 Pin Conn.B1" "48 Pin Conn.B2" "48 Pin Conn.F3" "48 Pin Conn.L4" "48 Pin Conn.M1" "48 Pin Conn.M2" "48 Pin Conn.M3" "48 Pin Conn.M4" "ADC Clock Gen.7" "RTC Power Batt.1" "Step Down.2" "Teensy 4.1.GND1" "Teensy 4.1.GND2" "Teensy 4.1.GND3" "Teensy 4.1.GND4" "VREF Gen.4" ADS1256.2 ADS1256.3 ADS1256.5 ADS1256.17 Batt.2 C0.2 C01.1 C1.2 C02.1 C2.2 C03.1 C3.2 C4.2 C04.2 C05.2 C5.2 C6.2 C06.2 C7.2 C07.2 C08.2 CAN.4 Display.1 DS1.2 DS2.2 DS3.2 DS4.2 GND.1 GND.2 GND.3 GND.4 GND.5 Hi.2 Hi.15 I2C.4 I/O.2 pad.15 pad.16 Rec.2 SPI.2 UART.4 XBee.10 | length 68.4
  Top Layer w0.254: 31.369,48.076 31.398,48.048 32.377,48.048 ADS1256.3 ; ADS1256.5 32.44,46.736 33.528,46.736 ; ADS1256.2 32.433,48.641 33.528,48.641 ; 38.158,42.16 38.174,42.176 39.198,42.176 ADS1256.17 ; Hi.15 71.501,32.004
  Top Layer w0.5: C5.2 v1(8.255,17.526) ; v1(10.668,65.913) C4.2 ; C6.2@13.081,15.078 C6.2 v1(13.081,17.653) ; v1(16.002,65.913) C3.2 ; v1(21.336,65.913) C2.2 ; v1(24.638,57.277) 24.701,57.34 26.896,57.34 C0.2 ; v1(24.638,62.992) C1.2 C1.2@27.015,62.992 ; v1(24.765,24.257) C7.2 ; C03.1 28.259,31.242 31.203,31.242 31.496,30.949 31.496,29.845 33.147,28.194 ; v1(29.591,52.07) 29.591,50.104 29.464,49.977 C08.2 29.527,48.543 30.832,48.543 31.299,48.076 31.369,48.076 ; v1(33.147,27.302) 33.147,28.194 ; 33.414,29.972 33.193,29.972 33.147,29.926 33.147,28.194 ; 33.528,46.736 v1(35.433,46.736) 33.528,48.641 ; C07.2 v1(38.735,52.07) ; v1(36.703,42.037) 36.85,42.184 38.134,42.184 38.158,42.16 ; C05.2 41.2,30.007 39.387,28.194 33.147,28.194 ; C06.2@43.998,39.497 C06.2 v1(46.736,39.497) ; C01.1 v1(59.563,69.342) ; C02.1 v1(59.563,74.676)
Net1_1: 5V.1 5V.2 5V.3 5V.4 5V.5 "48 Pin Conn.A2" "48 Pin Conn.E3" "48 Pin Conn.L2" "Step Down.3" "Teensy 4.1.VIN" ADS1256.1 C02.2 C07.1 Display.2 Hi.1 I2C.1 SPI.3 UART.1 | length 31.6
  Top Layer w0.254: ADS1256.1@32.385,49.53 32.385,49.339 ADS1256.1
  Top Layer w0.5: ADS1256.1@32.385,49.53 34.256,51.401 34.401,51.401 34.995,51.995 C07.1 v1(32.385,52.07) ; 36.767,77.406 39.878,74.295 55.369,74.295 55.62,74.546 55.67,74.546 55.75,74.626 C02.2 55.75,74.726 54.867,75.608 54.112,75.608 53.287,76.434 52.09,76.434 v1(51.943,76.581)
Net1_3: 2.15 3V3.1 3V3.2 3V3.3 3V3.4 3V3.5 "48 Pin Conn.A4" "ADC Clock Gen.14" "Teensy 4.1.3.3V_1" "Teensy 4.1.3.3V_2" ADS1256.16 C06.1 CAN.1 Hi.3 SPI.1 XBee.1 | length 12.8
  Top Layer w0.254: ADS1256.16 40.278,41.51
  Top Layer w0.5: 40.278,41.51 40.894,40.894 40.894,40.072 41.469,39.497 C06.1 ; C06.1@42.975,39.624 43.048,39.697 43.048,39.818 43.244,40.014 43.244,40.156 43.539,40.451 44.134,40.451 44.456,40.773 45.882,40.773 46.257,41.148 47.013,41.148 47.394,41.529 v1(49.784,41.529)
Net1_4: "Teensy 4.1.23" ADS1256.15 Hi.4 | length 88.5
  Top Layer w0.254: ADS1256.15 46.565,33.509 63.227,33.509 65.151,35.433 71.374,35.433 80.518,44.577 85.194,44.577 86.972,42.799 102.721,42.799 102.87,42.65 102.87,35.433 99.441,32.004 Hi.4
Net1_5: "Teensy 4.1.22" ADS1256.21 Hi.5 | length 122.8
  Top Layer w0.254: ADS1256.21 39.176,44.722 37.952,44.722 35.687,42.458 35.687,40.553 42.839,33.401 44.704,33.401 45.339,32.766 45.339,28.956 34.163,17.78 34.163,12.023 38.058,8.128 49.149,8.128 54.23,13.209 54.23,15.622 56.134,17.526 59.944,17.526 67.917,25.499 94.714,25.499 Hi.5 96.901,32.004
Net1_6: "48 Pin Conn.K2" "Teensy 4.1.21" Hi.6 | length 90
  Top Layer w0.254: Hi.6 94.361,32.004
  Bottom Layer w0.254: 14.796,34.523 15.977,33.342 36.667,33.342 41.444,38.119 63.037,38.119 64.199,36.957 85.792,36.957 90.316,32.433 90.316,32.045 91.392,30.969 93.326,30.969 94.361,32.004
Net1_7: "48 Pin Conn.J2" "Teensy 4.1.20" Hi.7 | length 87.8
  Top Layer w0.254: Hi.7 91.821,32.004
  Bottom Layer w0.254: 14.796,37.023 15.977,35.842 38.449,35.842 43.12,40.513 48.645,40.513 49.153,40.005 56.615,40.005 57.269,40.659 63.949,40.659 67.143,37.465 86.36,37.465 91.821,32.004
Net1_8: "48 Pin Conn.H3" "Teensy 4.1.19" Display.3 Hi.8 I2C.3 | length 193.1
  Top Layer w0.254: 10.796,39.523 9.398,38.125 9.398,26.333 4.191,21.126 4.191,12.954 9.779,7.366 61.214,7.366 63.881,10.033 63.881,15.599 64.03,15.748 I2C.3 ; Hi.8 89.281,32.004 89.281,37.465 91.567,39.751 94.742,39.751 95.504,38.989 v1(100.965,38.989) ; v1(105.283,38.989) 108.585,38.989 115.189,45.593 115.189,61.341 Display.3
  Bottom Layer w0.254: I2C.3 65.913,17.708 66.811,18.606 66.833,18.606 68.135,19.908 68.135,19.93 73.332,25.127 80.181,25.127 80.553,25.499 87.094,25.499 Hi.8 ; v1(100.965,38.989) v1(105.283,38.989)
Net1_9: "48 Pin Conn.G3" "Teensy 4.1.18" Display.4 Hi.9 I2C.2 | length 192.4
  Top Layer w0.254: 10.796,42.023 7.977,39.204 7.977,26.834 3.683,22.54 3.683,12.744 9.569,6.858 62.103,6.858 I2C.2 ; Hi.9 86.741,32.004 86.741,36.83 91.059,41.148 v1(100.965,41.148) ; v1(105.283,41.148) 108.712,41.148 114.173,46.609 114.173,59.817 Display.4
  Bottom Layer w0.254: I2C.2 64.707,11.874 64.707,17.22 66.601,19.114 66.623,19.114 67.627,20.118 67.627,20.14 73.122,25.635 79.971,25.635 80.343,26.007 85.062,26.007 Hi.9 ; v1(100.965,41.148) v1(105.283,41.148)
Net1_10: "48 Pin Conn.F2" "Teensy 4.1.17" Hi.10 | length 91.3
  Top Layer w0.254: Hi.10 84.201,32.004
  Bottom Layer w0.254: 14.796,44.523 13.615,43.342 13.615,34.139 13.841,33.828 ccw(c14.796,34.523) 14.12,33.554 15.763,32.408 cw(c14.796,31.023) 16.008,32.199 17.948,30.2 ccw(c18.796,31.023) 18.101,30.068 18.412,29.842 39.156,29.842 44.894,35.579 78.804,35.579 81.344,33.039 83.166,33.039 84.201,32.004
Net1_11: "48 Pin Conn.E2" "Teensy 4.1.16" Hi.11 | length 91.4
  Top Layer w0.254: Hi.11 81.661,32.004
  Bottom Layer w0.254: 14.796,47.023 13.181,45.408 13.107,43.557 13.107,43.552 13.107,33.929 13.479,33.465 ccw(c14.796,34.523) 13.757,33.191 13.793,33.164 15.472,31.992 cw(c14.796,31.023) 15.645,31.844 17.453,29.977 17.985,29.446 18.096,29.334 39.367,29.334 43.072,33.039 67.583,33.039 68.707,34.163 77.68,34.163 78.804,33.039 80.626,33.039 81.661,32.004
Net1_12: "48 Pin Conn.D2" "Teensy 4.1.15" Hi.12 | length 93.9
  Top Layer w0.254: Hi.12 79.121,32.004
  Bottom Layer w0.254: 14.796,49.523 12.673,47.4 12.599,45.544 12.599,33.06 13.02,31.906 13.081,31.732 13.309,30.993 ccw(c14.973,31.578) 14.438,29.897 17.771,28.838 17.848,28.826 39.577,28.826 40.596,29.845 48.618,29.845 49.507,30.734 67.542,30.734 67.691,30.883 67.691,32.429 68.917,33.655 77.47,33.655 79.121,32.004
Net1_13: "48 Pin Conn.C2" "Teensy 4.1.14" Hi.13 | length 94.8
  Top Layer w0.254: Hi.13 76.581,32.004
  Bottom Layer w0.254: 14.796,52.023 12.165,49.392 12.091,47.541 12.091,45.755 12.091,45.054 12.091,33.586 12.091,32.851 12.573,31.635 12.829,30.818 12.867,30.717 12.872,30.708 12.916,30.612 ccw(c14.973,31.578) 13.712,29.689 15.401,28.561 15.405,28.559 16.647,28.031 16.756,27.921 17.889,26.566 17.891,26.564 ccw(c18.796,27.323) 19.09,26.179 19.518,26.289 20.149,26.289 29.788,26.142 29.999,26.142 30.073,26.216 32.175,28.318 39.992,28.318 41.011,29.337 48.828,29.337 49.717,30.226 74.803,30.226 76.581,32.004
Net1_14: "Teensy 4.1.13" Hi.14 R01.1 | length 58.3
  Top Layer w0.254: R01.1 44.969,47.752 46.228,46.493 46.228,46.47 48.629,44.069 54.999,44.069 55.399,43.669 v1(69.958,43.669) ; Hi.14 74.041,32.004 82.55,40.513 v1(82.55,42.672)
  Bottom Layer w0.254: v1(69.958,43.669) 80.372,43.669 81.407,42.634 82.512,42.634 v1(82.55,42.672)
Net1_16: "48 Pin Conn.H2" "Teensy 4.1.41" Hi.16 | length 127.4
  Top Layer w0.254: Hi.16 68.961,32.004
  Bottom Layer w0.254: 14.796,39.523 17.126,39.523 18.445,40.842 32.578,40.842 32.757,41.021 48.855,41.021 49.363,40.513 56.405,40.513 59.091,43.199 62.128,43.199 64.993,40.334 88.818,40.334 91.683,37.469 94.469,37.469 97.936,34.002 97.936,31.388 96.647,30.099 79.375,30.099 77.724,31.75 77.724,32.531 77.216,33.039 71.072,33.039 70.037,32.004 68.961,32.004
Net1_17: "Teensy 4.1.40" Hi.17 R11.1 | length 38.2
  Top Layer w0.254: R11.1 37.338,16.267 40.358,19.287 47.056,19.287 49.803,22.034 51.288,22.034 52.749,23.495 57.012,23.495 58.276,24.759 63.494,24.759 Hi.17 66.421,32.004
Net1_18: "Teensy 4.1.39" Hi.18 | length 4.3
  Top Layer w0.254: Hi.18 63.881,32.004
Net1_19: "Teensy 4.1.38" Hi.19 | length 4.3
  Top Layer w0.254: Hi.19 61.341,32.004
Net1_20: "48 Pin Conn.G4" "Teensy 4.1.37" Hi.20 SPI.9 | length 107
  Top Layer w0.254: Hi.20 58.801,32.004
  Bottom Layer w0.254: 6.796,42.023 5.588,40.815 5.588,26.035 6.497,25.126 14.244,25.126 19.812,19.558 33.76,19.558 34.036,19.282 34.036,10.712 37.439,7.309 40.243,7.309 42.854,4.699 SPI.9 47.062,4.699 48.268,3.493 49.268,3.493 53.933,8.159 53.933,22.818 Hi.20
Net1_21: "48 Pin Conn.F4" "Teensy 4.1.36" Hi.21 SPI.8 | length 117.7
  Top Layer w0.254: Hi.21 56.261,32.004
  Bottom Layer w0.254: 6.796,44.523 5.08,42.807 5.08,24.765 9.271,20.574 17.145,20.574 18.669,19.05 33.252,19.05 33.528,18.774 33.528,10.501 39.267,4.762 41.085,4.762 SPI.8 42.862,2.985 49.478,2.985 54.483,7.99 54.483,21.59 60.198,27.305 60.198,28.321 59.436,29.083 57.658,29.083 Hi.21
Net1_22: "Teensy 4.1.35" Hi.22 R12.1 | length 32.2
  Top Layer w0.254: R12.1 37.338,11.987 36.195,13.13 36.195,16.637 39.751,20.193 47.244,20.193 53.721,26.67 53.721,32.004
Net1_23: "Teensy 4.1.34" Hi.23 Rec.1 | length 44.3
  Top Layer w0.254: Hi.23 51.181,32.004
  Bottom Layer w0.254: Rec.1 42.799,8.763 37.423,8.763 35.179,11.007 35.179,18.034 45.974,28.829 50.038,28.829 Hi.23
Net1_24: "48 Pin Conn.H4" "Teensy 4.1.33" Hi.24 SPI.10 | length 97.3
  Top Layer w0.254: Hi.24 48.641,32.004
  Bottom Layer w0.254: 6.796,39.523 7.977,38.342 7.977,26.416 8.759,25.634 20.086,25.634 25.654,20.066 34.268,20.066 34.544,19.79 34.544,10.922 37.211,8.255 45.212,8.255 SPI.10 48.768,8.763 46.99,10.541 46.99,20.32 48.641,21.971 Hi.24
Net2_2: 2.2 "48 Pin Conn.E4" "Teensy 4.1.0" SPI.7 | length 185.1
  Top Layer w0.254: 104.521,47.244 2.2
  Bottom Layer w0.254: 6.796,47.023 4.572,44.799 4.572,24.511 9.144,19.939 17.062,19.939 18.459,18.542 32.744,18.542 33.02,18.266 33.02,9.017 SPI.7 39.56,2.477 49.911,2.477 51.498,4.064 92.881,4.064 111.506,22.689 111.506,40.259 110.289,41.476 104.521,47.244
Net2_3: 2.3 "48 Pin Conn.C4" "Teensy 4.1.1" SPI.5 | length 200.3
  Top Layer w0.254: 101.981,47.244 2.3
  Bottom Layer w0.254: 6.796,52.023 3.556,48.783 3.556,24.09 18.868,8.778 25.639,8.778 SPI.5 32.956,1.461 50.673,1.461 52.24,3.028 94.214,3.028 113.284,22.098 113.284,47.186 111.305,49.165 107.873,52.597 103.016,52.597 2.3
Net2_4: 2.4 "Teensy 4.1.2" | length 4.3
  Top Layer w0.254: 99.441,47.244 2.4
Net2_5: 2.5 "Teensy 4.1.3" | length 4.3
  Top Layer w0.254: 96.901,47.244 2.5
Net2_6: 2.6 "Teensy 4.1.4" | length 4.3
  Top Layer w0.254: 94.361,47.244 2.6
Net2_7: 2.7 "Teensy 4.1.5" | length 4.3
  Top Layer w0.254: 91.821,47.244 2.7
Net2_8: 2.8 "Teensy 4.1.6" | length 4.3
  Top Layer w0.254: 89.281,47.244 2.8
Net2_9: 2.9 "48 Pin Conn.C3" "Teensy 4.1.7" UART.2 XBee.2 | length 189.9
  Top Layer w0.254: 86.741,47.244 2.9
  Bottom Layer w0.254: 10.796,52.023 9.615,53.204 9.615,57.621 10.795,58.801 52.043,58.801 XBee.2 57.019,53.825 80.862,53.825 82.696,51.991 82.696,51.603 83.772,50.527 84.63,50.527 85.665,51.562 2.9 ; UART.2 63.246,8.763 67.437,8.763 69.692,11.018 88.234,11.018 99.822,22.606 106.172,22.606 110.998,27.432 110.998,39.707 104.858,45.847 88.138,45.847 86.741,47.244
Net2_10: 2.10 "48 Pin Conn.D3" "Teensy 4.1.8" UART.3 XBee.3 | length 195
  Top Layer w0.254: 84.201,47.244 2.10
  Bottom Layer w0.254: 10.796,49.523 9.107,51.212 9.107,57.831 10.585,59.309 53.535,59.309 XBee.3 58.511,54.333 81.43,54.333 2.10 ; UART.3 61.341,12.424 61.341,12.319 61.49,12.17 62.158,11.555 cw(c61.341,10.668) 62.22,11.494 63.065,10.595 64.389,9.271 67.183,9.271 69.469,11.557 87.884,11.557 99.441,23.114 105.918,23.114 110.49,27.686 110.49,39.497 104.648,45.339 86.106,45.339 84.201,47.244
Net2_11: 2.11 "Teensy 4.1.9" | length 4.3
  Top Layer w0.254: 81.661,47.244 2.11
Net2_12: 2.12 "Teensy 4.1.10" R03.1 | length 44.4
  Top Layer w0.254: R03.1 45.789,42.291 46.551,43.053 51.054,43.053 55.753,38.354 70.231,38.354 79.121,47.244 2.12
Net2_13: 2.13 "Teensy 4.1.11" R02.1 | length 40.6
  Top Layer w0.254: R02.1 46.978,43.561 52.832,43.561 55.626,40.767 70.104,40.767 76.581,47.244 2.13
Net2_14: 2.14 "Teensy 4.1.12" ADS1256.22 | length 48.5
  Top Layer w0.254: ADS1256.22 39.176,45.448 38.294,45.448 37.933,45.809 37.933,49.561 38.288,49.916 44.572,49.916 46.732,47.756 46.736,47.752 46.736,46.68 47.315,46.101 71.822,46.101 72.965,47.244 74.041,47.244 2.14
Net2_16: 2.16 "Teensy 4.1.24" ADS1256.14 | length 49.6
  Top Layer w0.254: ADS1256.14 32.452,40.823 33.688,40.823 33.743,40.767 34.141,40.767 34.29,40.916 34.29,43.307 37.211,46.228 37.211,49.557 38.078,50.424 44.782,50.424 46.955,52.597 67.926,52.597 2.16 68.961,47.244
Net2_17: 2.17 "48 Pin Conn.G2" "Teensy 4.1.25" | length 58.1
  Top Layer w0.254: 66.421,47.244 2.17
  Bottom Layer w0.254: 14.796,42.023 17.126,42.023 18.445,43.342 58.515,43.342 60.912,45.739 64.916,45.739 66.421,47.244
Net2_18: 2.18 "48 Pin Conn.D4" "Teensy 4.1.26" SPI.6 | length 236.5
  Top Layer w0.254: 63.881,47.244 2.18
  Bottom Layer w0.254: 6.796,49.523 4.064,46.791 4.064,24.301 8.934,19.431 16.851,19.431 18.248,18.034 32.363,18.034 32.512,17.885 32.512,5.715 SPI.6 36.258,1.969 50.463,1.969 52.05,3.556 93.091,3.556 112.014,22.479 112.014,45.425 108.798,48.641 99.397,48.641 99.251,48.495 65.132,48.495 63.881,47.244
Net2_19: 2.19 "48 Pin Conn.B4" "Teensy 4.1.27" SPI.4 | length 250.7
  Top Layer w0.254: 61.341,47.244 2.19
  Bottom Layer w0.254: 6.796,54.523 3.048,50.775 3.048,20.955 15.733,8.27 22.337,8.27 SPI.4 29.654,0.953 50.927,0.953 52.494,2.52 94.468,2.52 113.792,21.844 113.792,47.396 108.083,53.105 101.873,53.105 100.711,51.943 100.711,50.673 99.041,49.003 63.1,49.003 61.341,47.244
Net2_20: 2.20 "Teensy 4.1.28" | length 4.3
  Top Layer w0.254: 58.801,47.244 2.20
Net2_21: 2.21 "Teensy 4.1.29" | length 4.3
  Top Layer w0.254: 56.261,47.244 2.21
Net2_24: 2.24 "Teensy 4.1.32" | length 4.3
  Top Layer w0.254: 48.641,47.244 2.24
Net12V_1: 12V.1 12V.2 "48 Pin Conn.L3" "Step Down.1" "VREF Gen.2" Batt.1 C01.2 C03.2 C04.1 | length 76.9
  Top Layer w0.5: Batt.1 21.844,80.518 25.019,80.518 36.195,69.342 C01.2 55.75,69.392 55.67,69.472 55.62,69.472 53.083,72.009 36.957,72.009 31.585,77.381 ; v1(27.051,34.417) 27.051,32.808 27.344,32.515 C03.2@28.194,32.515 ; C03.2 28.259,32.512 33.414,32.512
"Net48 Pin Conn_A1": "48 Pin Conn.A1" "48 Pin Conn.L1" "VREF Gen.6" ADS1256.4 C05.1 C08.1 | length 10.5
  Top Layer w0.254: 31.322,47.322 32.377,47.322 ADS1256.4
  Top Layer w0.5: v1(27.432,47.244) 27.64,47.244 27.802,47.406 C08.1 29.548,47.322 31.322,47.322 ; 38.214,31.242 38.233,31.223 41.17,31.223 41.172,31.224 43.543,31.224 v1(43.561,31.242)
"Net48 Pin Conn_A3": 2.22 "48 Pin Conn.A3" "Teensy 4.1.30" CAN.2 | length 210
  Top Layer w0.254: 53.721,47.244 2.22 ; v1(94.468,10.628) 94.615,10.775 104.628,10.775 v1(104.775,10.922)
  Bottom Layer w0.254: 10.796,57.023 13.126,57.023 14.396,58.293 40.132,58.293 49.911,48.514 52.642,48.514 53.721,47.435 53.721,47.244 55.988,49.511 96.882,49.511 98.171,50.8 98.171,51.943 99.841,53.613 108.294,53.613 114.808,47.099 114.808,20.955 v1(104.775,10.922) ; CAN.2 59.245,8.192 92.032,8.192 v1(94.468,10.628)
"Net48 Pin Conn_B3": 2.23 "48 Pin Conn.B3" "Teensy 4.1.31" CAN.3 | length 219.4
  Top Layer w0.254: 51.181,47.244 2.23 ; v1(94.488,8.636) 94.551,8.572 105.6,8.572 v1(105.664,8.509)
  Bottom Layer w0.254: 10.796,54.523 13.126,54.523 14.307,55.704 41.832,55.704 50.292,47.244 51.181,47.244 ; 2.23 52.724,50.019 94.596,50.019 95.631,51.054 95.631,52.07 97.682,54.121 109.179,54.121 115.316,47.984 115.316,18.161 v1(105.664,8.509) ; CAN.3 56.769,13.372 55.563,12.166 55.563,10.168 58.047,7.684 93.536,7.684 v1(94.488,8.636)
"Net48 Pin Conn_C1": "48 Pin Conn.C1" ADS1256.6 R0.1 | length 25.1
  Top Layer w0.254: R0.1@26.742,54.61 21.383,54.61 18.796,52.023 24.759,46.06 ADS1256.6
"Net48 Pin Conn_D1": "48 Pin Conn.D1" ADS1256.7 R1.1 | length 34
  Top Layer w0.254: R1.1@26.742,60.198 20.301,60.198 17.615,57.512 17.615,50.704 18.796,49.523 22.909,45.41 ADS1256.7
"Net48 Pin Conn_E1": "48 Pin Conn.E1" ADS1256.8 R2.1 | length 38.9
  Top Layer w0.254: R2.1 24.003,64.619 17.107,57.723 17.107,48.712 18.796,47.023 21.059,44.76 ADS1256.8
"Net48 Pin Conn_F1": "48 Pin Conn.F1" ADS1256.9 R3.1 | length 39
  Top Layer w0.254: R3.1 18.669,60.003 16.599,57.933 16.599,46.72 18.796,44.523 19.16,44.523 19.617,44.066 31.642,44.066 31.686,44.11 ADS1256.9
"Net48 Pin Conn_G1": "48 Pin Conn.G1" ADS1256.10 R4.1 | length 42.3
  Top Layer w0.254: R4.1 13.335,60.154 15.977,57.512 15.977,44.842 18.796,42.023 20.233,43.46 ADS1256.10
"Net48 Pin Conn_H1": "48 Pin Conn.H1" ADS1256.11 R5.1 | length 45.2
  Top Layer w0.254: R5.1 5.885,15.753 5.885,17.101 9.612,20.828 10.668,20.828 16.383,26.543 16.383,37.11 18.796,39.523 19.054,39.781 19.054,40.263 21.601,42.81 ADS1256.11
"Net48 Pin Conn_J1": "48 Pin Conn.J1" ADS1256.12 R6.1 | length 40.7
  Top Layer w0.254: R6.1 10.668,20.11 16.891,26.333 16.891,35.118 18.796,37.023 18.796,37.338 23.618,42.16 ADS1256.12
"Net48 Pin Conn_K1": "48 Pin Conn.K1" ADS1256.13 R7.1 | length 37.4
  Top Layer w0.254: R7.1@26.836,21.59 20.955,21.59 17.399,25.146 17.399,33.126 18.796,34.523 25.783,41.51 ADS1256.13
"NetADC Clock Generator_8": "ADC Clock Gen.8" ADS1256.19 | length 87
  Top Layer w0.254: ADS1256.19 39.251,43.423 40.377,43.423 42.396,41.404 45.621,41.404 46.762,42.545 50.205,42.545 56.809,35.941 69.596,35.941 80.391,46.736 80.391,57.809 94.767,72.185 100.69,72.185
NetADS1256_20: ADS1256.20 R03.2 | length 4.8
  Top Layer w0.254: ADS1256.20 39.251,44.147 40.065,44.147 40.072,44.154 40.364,44.154 42.227,42.291 R03.2
NetADS1256_23: ADS1256.23 R02.2 | length 3.9
  Top Layer w0.254: ADS1256.23 39.251,46.023 41.099,46.023 41.529,45.593 R02.2@42.871,45.593
NetADS1256_24: ADS1256.24 R01.2 | length 4.1
  Top Layer w0.254: ADS1256.24 40.9,46.71 41.942,47.752 R01.2@42.871,47.752
NetC0_1: C0.1 R0.2 | length 2.8
  Top Layer w0.254: C0.1 28.159,54.733 R0.2
NetC1_1: C1.1 R1.2 | length 2.8
  Top Layer w0.254: C1.1 28.159,60.321 R1.2
NetC2_1: C2.1 R2.2 | length 2.7
  Top Layer w0.254: C2.1 23.958,69.49 R2.2
NetC3_1: C3.1 R3.2 | length 2.7
  Top Layer w0.254: C3.1 18.569,69.49 R3.2
NetC4_1: C4.1 R4.2 | length 2.7
  Top Layer w0.254: C4.1 13.254,69.454 R4.2
NetC5_1: C5.1 R5.2 | length 2.5
  Top Layer w0.254: R5.2 5.797,13.965 C5.1
NetC6_1: C6.1 R6.2 | length 2.5
  Top Layer w0.254: R6.2 10.791,14.005 C6.1
NetC7_1: C7.1 R7.2 | length 2.7
  Top Layer w0.254: C7.1 28.306,21.605 R7.2
NetDS1_1: DS1.1 R11.2 | length 3.3
  Top Layer w0.254: R11.2 37.338,14.5 37.611,14.227 DS1.1
NetDS2_1: DS2.1 R12.2 | length 3.3
  Top Layer w0.254: R12.2 37.338,10.187 37.616,9.909 DS2.1
NetDS3_1: DS3.1 R13.2 | length 3.3
  Top Layer w0.254: R13.2 17.907,14.5 18.18,14.227 DS3.1
NetDS4_1: DS4.1 R14.2 | length 3.3
  Top Layer w0.254: R14.2 17.907,10.182 18.18,9.909 DS4.1
NetI/O_1: "Teensy 4.1.ON/OFF" I/O.1 | length 40.4
  Top Layer w0.254: I/O.1 52.959,22.987 63.186,22.987 67.691,27.492 67.691,33.436 66.929,34.198 v1(66.929,34.29)
  Bottom Layer w0.254: 61.341,34.544 63.979,34.544 64.233,34.29 v1(66.929,34.29)
"NetRTC power batt_2": "RTC Power Batt.2" "Teensy 4.1.VBAT" | length 83
  Top Layer w0.254: v1(107.95,37.592) 111.633,37.592 115.824,33.401 115.824,14.732 114.427,13.335 114.419,13.335
  Bottom Layer w0.254: 61.341,44.704 64.456,41.589 83.312,41.589 84.776,43.053 105.791,43.053 107.95,40.894 v1(107.95,37.592)
"NetTeensy 4.1_46": 
"NetTeensy 4.1_50": 
"NetTeensy 4.1_51": 
pads on no net: 3.1 4.1 "48 Pin Conn.J3" "48 Pin Conn.J4" "48 Pin Conn.K3" "48 Pin Conn.K4" "48 Pin Conn.MOUNT1" "48 Pin Conn.MOUNT2" "ADC Clock Gen.1" "Teensy 4.1.3.3V_3" "Teensy 4.1.5V" "Teensy 4.1.D+" "Teensy 4.1.D-" "Teensy 4.1.GND5" "Teensy 4.1.LED" "Teensy 4.1.PROGRAM" "Teensy 4.1.R+" "Teensy 4.1.R-" "Teensy 4.1.T+" "Teensy 4.1.T-" "Teensy 4.1.USB_GND1" "Teensy 4.1.USB_GND2" "Teensy 4.1.VUSB" "VREF Gen.1" "VREF Gen.3" "VREF Gen.5" "VREF Gen.7" "VREF Gen.8" ADS1256.18 ADS1256.25 ADS1256.26 ADS1256.27 ADS1256.28 Display.S1 Display.S2 Display.S3 Display.S4 R13.1 R14.1 XBee.4 XBee.5 XBee.6 XBee.7 XBee.8 XBee.9 XBee.11 XBee.12 XBee.13 XBee.14 XBee.15 XBee.16 XBee.17 XBee.18 XBee.19 XBee.20

## Polygon pours and split planes (outlines as drawn)
Net1_1 on Power "NET1_1_L03_P004" (solid, pour order 4): 34.798,83.82 120.396,83.82 120.396,0 0,0 0,19.558 28.321,19.558 33.262,24.499 33.401,29.21 48.26,29.083 20.828,56.515 20.828,59.182 16.51,59.182 16.51,29.337 12.827,29.337 12.827,33.02 9.525,33.02 9.525,56.896 16.256,63.627 34.544,63.627 34.544,53.34 49.53,38.354 58.039,38.354 58.039,29.464 40.259,11.684 19.558,11.684 18.161,13.081 16.129,13.081 11.557,8.509 11.557,2.794 16.129,2.794 20.193,6.858 29.591,6.858 33.401,3.048 59.182,3.048 59.182,7.239 68.199,7.239 68.199,3.429 73.66,3.429 73.66,23.495 106.267,23.749 106.267,37.323 99.695,37.323 99.695,49.657 99.695,56.515 99.695,75.057 84.963,75.057 78.486,68.58 34.798,68.58
Net1_3 on Power "NET1_3_L03_P005" (solid, pour order 5): 5.207,55.626 9.144,55.626 9.144,57.531 9.779,57.531 16.256,64.008 34.925,64.008 34.925,53.467 49.657,38.735 58.42,38.735 58.42,29.337 40.386,11.303 19.431,11.303 18.034,12.7 16.256,12.7 12.065,8.509 11.938,8.509 11.938,3.175 16.002,3.175 20.066,7.239 29.845,7.239 33.528,3.556 58.674,3.556 58.674,7.62 68.58,7.62 68.58,3.81 73.152,3.81 73.152,23.926 105.926,24.13 105.926,37.009 99.314,37.009 99.314,49.911 99.314,74.676 85.217,74.676 78.74,68.199 15.621,68.199 5.207,57.785 5.207,57.658
Net12V_1 on Power "NET12V_1_L03_P001" (solid, pour order 1): 23.876,32.512 23.876,36.957 32.889,36.957 32.925,25.041 28.067,20.066 0,20.066 0,83.82 34.29,83.82 34.29,68.58 15.367,68.58 4.826,58.039 4.826,55.245 9.144,55.245 9.113,32.639 12.446,32.639 12.446,28.962 20.32,28.956 22.225,30.861
"Net48 Pin Conn_A1" on Power "NET48_PIN_CONN_A1_L03_P000" (solid, pour order 0): 16.891,29.337 20.066,29.337 23.368,32.639 23.368,37.338 33.401,37.338 33.401,29.464 47.371,29.464 20.32,56.515 20.32,58.674 16.891,58.674 16.891,57.531
GND on GND (split plane): 119.886,0.51 0.51,0.51 0.51,83.31 119.886,83.31

## Silkscreen, mask and mechanical layers (free items; w line width, h text height)
Top Overlay:
  drawing of 16 lines, arcs and shapes, not listed
  text "GND" at 11.557,73.533 h1.1
  text "GTOR DAQ 2025 - 2026" at 115.797,72.771 h1 r270
  text "Designed by Kyle Jiang and Andrew Rissler" at 117.729,72.771 h1 r270
Mechanical 1:
  the board outline again, w0.254

## Text inside footprints (layer, text, board x,y; h text height)
"48 Pin Conn": Mechanical 13 "RefDes2" at 12.161,44.395 h1.27 r270